# Altium PCB 40 pin hbridge.PcbDoc
Units mm, origin at the board's own origin, x right, y up, seen from the top; angles counter-clockwise.
Board outline 214.76 x 118.74 mm, 2 copper layers (Top Layer, Bottom Layer); 18 components, 24 nets, 141 pads, 21 vias.
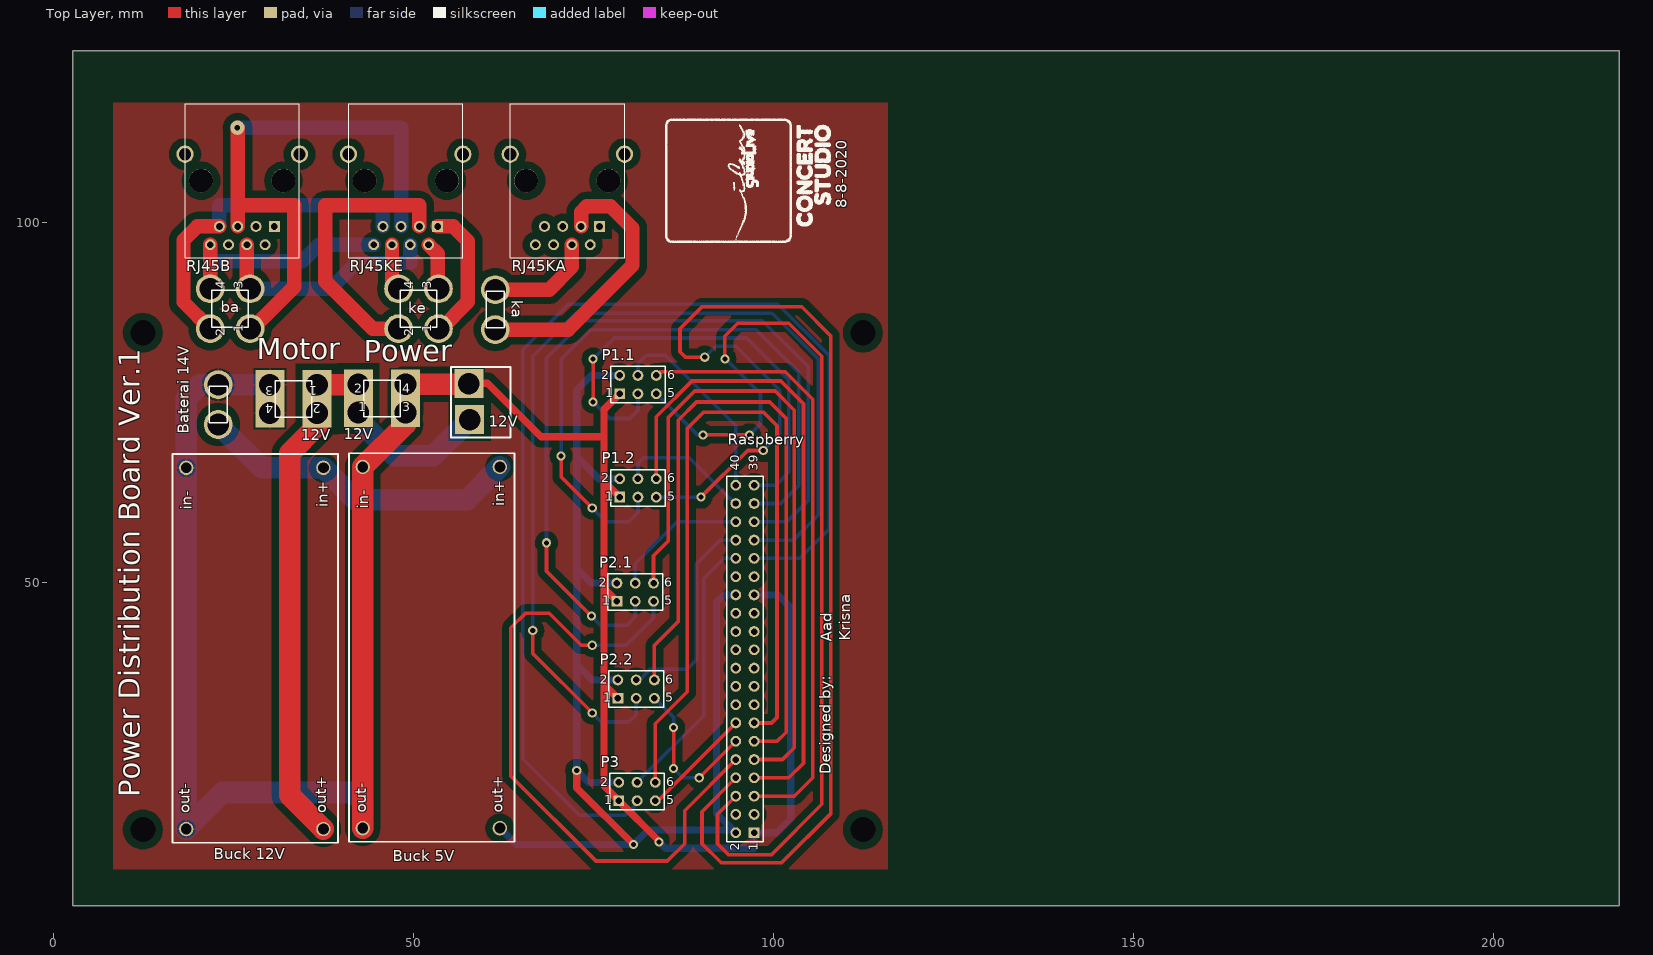
[diagram p0: Top Layer view]
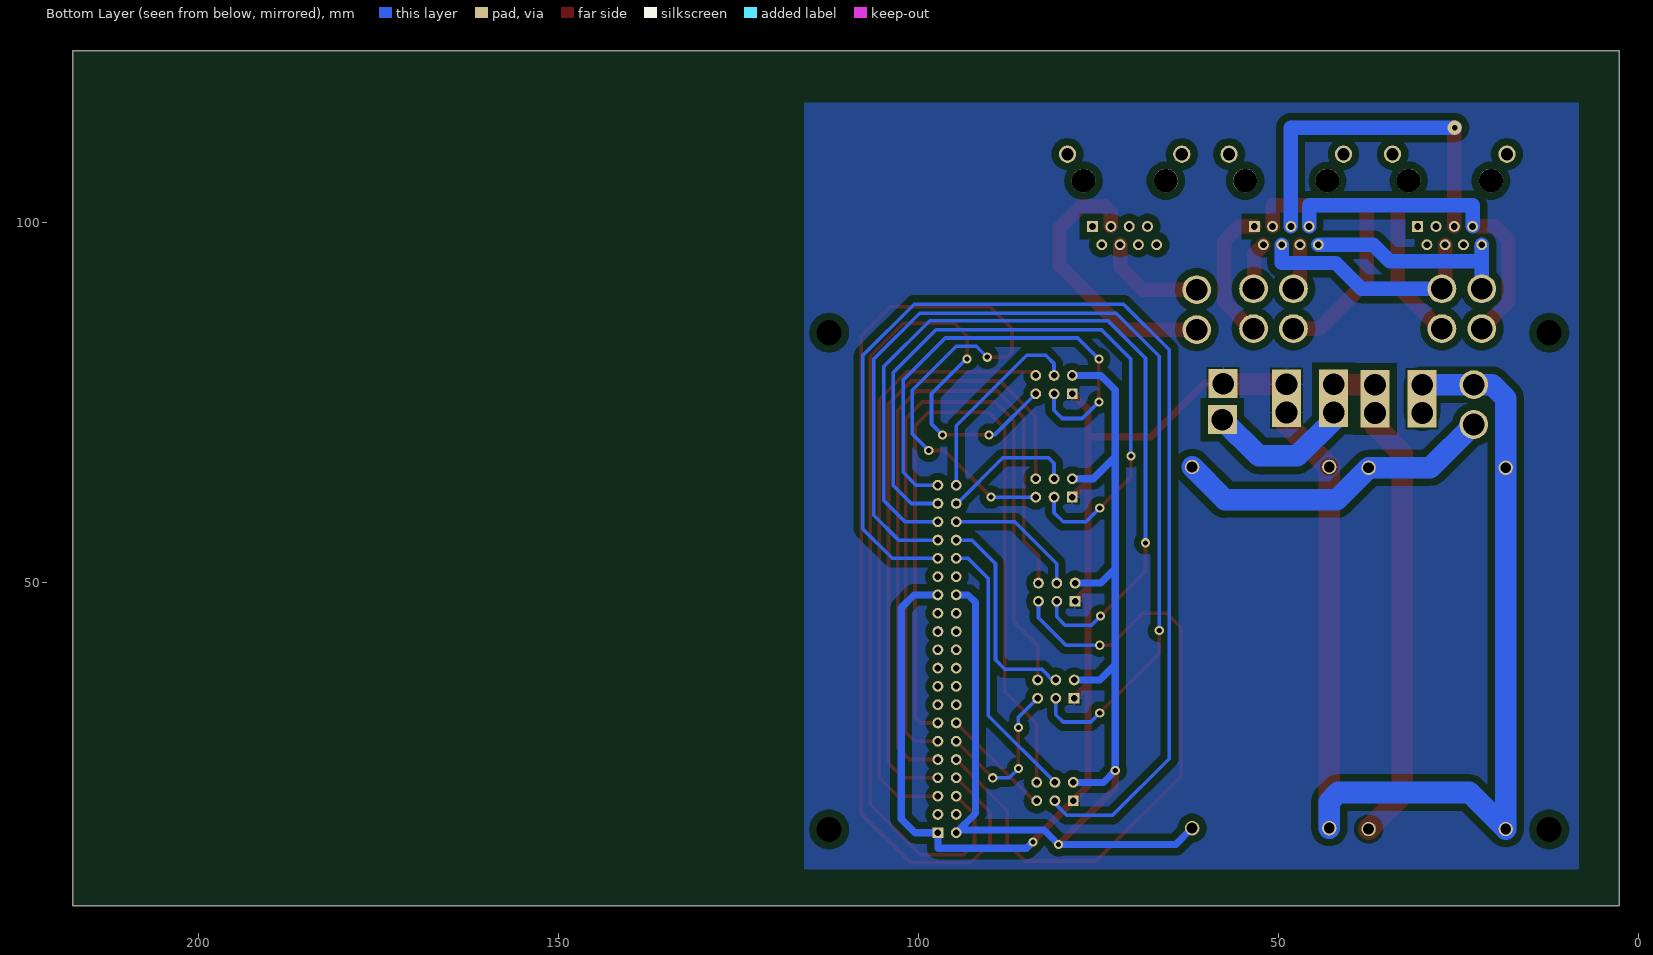
[diagram p1: Bottom Layer view, seen from below]

## Layer stack, top to bottom
Top Solder: solder mask 0.0102, Solder Resist, Dk 3.5
Top Layer: signal copper 0.0356
Dielectric 1: dielectric 0.32, FR-4, Dk 4.8
Bottom Layer: signal copper 0.0356
Bottom Solder: solder mask 0.0102, Solder Resist, Dk 3.5

## Board outline
2.667,5.08 58.928,5.08 110.49,5.08 165.735,5.08 217.424,5.08 217.424,123.825 165.735,123.825 110.49,123.825 58.928,123.825 2.667,123.825

## Design rules (kind name [scope] priority, off if disabled: settings)
Clearance [All] p1: gap=0.5
PolygonConnect [All] p1: connectstyle=Relief reliefconductorwidth=0.254 reliefentries=4 polygonreliefangle="90 Angle" airgapwidth=0.254
RoutingVias [All] p1: holewidth=0.711 width=1.27 viastyle="Through Hole" minholewidth=0.711 minwidth=1.27 maxholewidth=0.711 maxwidth=1.27
SolderMaskExpansion [All] p1: expansion=0.102
UnpouredPolygon [All] p1: allowunpoured=FALSE
Width [All] p1: maxlimit=3 minlimit=0.5 preferedwidth=1
29 further rules are at their usual default settings.

## Classes and differential pairs
component class "40 pin hbridge": "Baterai 14V" P1.1 P1.2 P2.1 P2.2 P3 Raspberry

## Components (designator, comment, footprint, x,y, rotation, side; value= is the part's Value field where it differs from the comment)
12V "Header 2X2" HDR2X2#1 44.323,74.295 r0 top
12V "Header 2X2" HDR2X2#1 34.576,76.77 r180 top
12V "Header" PCBComponent_1#1 55.372,70.612 r90 top
ba "Header 2X2" HDR2X2#2 25.781,86.741 r90 top
"Baterai 14V" "Header 2" HDR1X2 22.86,73.43 r90 top
"Buck 5V" "Buck 5V" PCBComponent_1#2 41.021,13.97 r90 top (schematic designator *)
"Buck 12V" "Buck 12V" PCBComponent_1#2 16.51,13.843 r90 top (schematic designator *)
ka "Header 2" HDR1X2 61.341,86.614 r90 top
ke "Header 2X2" HDR2X2#2 51.943,86.741 r90 top
P1.1 "Header 3X2" HDR2X3 78.613,76.2 r0 top
P1.2 "Header 3X2" HDR2X3 78.613,61.849 r0 top
P2.1 "Header 3X2" HDR2X3 78.232,47.371 r0 top
P2.2 "Header 3X2" HDR2X3 78.359,33.909 r0 top
P3 "Header 3X2" HDR2X3 78.486,19.685 r0 top
Raspberry "Header 20X2" HDR2X20 97.282,15.24 r90 top
RJ45B "" PCBComponent_1#3 30.64,99.441 r180 top
RJ45KA "" PCBComponent_1#3 75.791,99.441 r180 top
RJ45KE "" PCBComponent_1#3 53.34,99.441 r180 top

## Footprints (in the part's own frame and the unit in brackets; to place one, negate y for a bottom-side part, rotate by r counter-clockwise, add the part's x,y. Pads: shape width x height; smd on the part's side, far side on the other; paste and mask are expansions set on the pad)
HDR1X2 [mm] "Connector; Header; 2 Position"
  round 4 hole 3: 1(-1.5,0) 2(4.04,0)
  silkscreen extent -1.27,-1.27 3.81,1.27
HDR2X2#1 [mm] "Connector; Header; 2x2 Position"
  rect 4x4 hole 3: 1(-2,-0.7) 2(-2,3.24) 3(4.54,-0.7) 4(4.54,3.24)
  silkscreen extent -1.27,-1.27 3.81,3.81
HDR2X2#2 [mm] "Connector; Header; 2x2 Position"
  round 4 hole 3: 1(-1.5,-1.5) 2(-1.5,4.04) 3(4.04,-1.5) 4(4.04,4.04)
  silkscreen extent -1.27,-1.27 3.81,3.81
HDR2X3 [mm] "Connector; Header; 3x2 Position"
  rect 1.5x1.5 hole 0.9: 1(0,0)
  round 1.5 hole 0.9: 2(0,2.54) 3(2.54,0) 4(2.54,2.54) 5(5.08,0) 6(5.08,2.54)
  silkscreen extent -1.27,-1.27 6.35,3.81
HDR2X20 [mm] "Connector; Header; 20x2 Position"
  rect 1.5x1.5 hole 0.9: 1(0,0)
  round 1.5 hole 0.9: 2(0,2.54) 3(2.54,0) 4(2.54,2.54) 5(5.08,0) 6(5.08,2.54) 7(7.62,0) 8(7.62,2.54) 9(10.16,0) 10(10.16,2.54) 11(12.7,0) 12(12.7,2.54) 13(15.24,0) 14(15.24,2.54) 15(17.78,0) 16(17.78,2.54) 17(20.32,0) 18(20.32,2.54) 19(22.86,0) 20(22.86,2.54) 21(25.4,0) 22(25.4,2.54) 23(27.94,0) 24(27.94,2.54) 25(30.48,0) 26(30.48,2.54) 27(33.02,0) 28(33.02,2.54) 29(35.56,0) 30(35.56,2.54) 31(38.1,0) 32(38.1,2.54) 33(40.64,0) 34(40.64,2.54) 35(43.18,0) 36(43.18,2.54) 37(45.72,0) 38(45.72,2.54) 39(48.26,0) 40(48.26,2.54)
  silkscreen extent -1.27,-1.27 49.53,3.81
PCBComponent_1#1 [mm]
  rect 4x4 hole 3: 1(1.999,-2.4) 2(6.999,-2.295)
  silkscreen extent -0.5,-8.1 9.3,0.2
PCBComponent_1#2 [mm]
  round 2 hole 1.5: 1(1.905,-1.905) 2(1.905,-20.955) 3(52.07,-1.905) 4(52.07,-20.955)
  silkscreen extent 0,-22.99 53.97,0
PCBComponent_1#3 [mm]
  round 2.4 hole 1.7: 0(-3.495,-10.03) 0(12.385,-10.03)
  rect 1.524x1.524 hole 0.95: 1(0,0)
  round 1.524 hole 0.95: 2(1.27,2.54) 3(2.54,0) 4(3.81,2.54) 5(5.08,0) 6(6.35,2.54) 7(7.62,0) 8(8.89,2.54)
  round 3.3 hole 3.3 unplated: ""(-1.27,-6.35) ""(10.16,-6.35)
  silkscreen extent -3.49,-17.05 12.38,4.35

## Part data
12V 12V ba ke: "Header, 2-Pin, Dual row"
12V "Buck 5V" "Buck 12V": library part Component_1
"Baterai 14V" ka: "Header, 2-Pin"
P1.1 P1.2 P2.1 P2.2 P3: "Header, 3-Pin, Dual row"
Raspberry: "Header, 20-Pin, Dual row"
RJ45B RJ45KA RJ45KE: library part R-RJ45R08P-B000

## Free pads (board coordinates)
  round 1.524 hole 3.5 mask+2: 1(12.389,15.68) 1(12.389,84.68) 1(112.389,15.68) 1(112.389,84.68)
  round 2 hole 0.762: 3(25.527,113.157)

## Via types
v1: diameter 1.27, hole 0.711, Top Layer to Bottom Layer, 21 vias

## Nets (pads, with @x,y where several pads share a name; then routed paths per layer and width w, separated by ;. In a path a pad name is that pad's centre, name@x,y a point inside that pad or via, vN(x,y) a via of type N, cw(c..) or ccw(c..) an arc to the next point about the centre after c; other vN are vias at no path point)
5V: "Buck 5V.2" P1.1.2 P1.2.2 P2.1.2 P2.2.2 P3.2 Raspberry.2 Raspberry.28 | length 170.9
  Top Layer w1: v1(72.644,23.876) 72.644,21.463 v1(80.518,13.589)
  Bottom Layer w1: 61.976,15.875 64.262,13.589 v1(80.518,13.589) 82.534,15.605 94.377,15.605 Raspberry.2 92.075,17.907 92.075,47.244 93.091,48.26 Raspberry.28 ; P2.1.2 74.676,49.911 72.644,51.943 ; P2.2.2 74.803,36.449 72.644,38.608 ; P3.2 74.295,22.225 v1(72.644,23.876) 72.644,38.608 ; P1.2.2 75.692,64.389 72.644,67.437 ; P1.1.2 74.676,78.74 72.644,76.708 72.644,67.437 ; 72.644,38.608 72.644,51.943 ; 72.644,51.943 72.644,67.437
12V: 12V.1 12V.2@36.576,73.53 12V.2@42.323,77.535 "Buck 12V.2" | length 95.4
  Top Layer w3: 37.465,15.748 32.766,20.447 32.766,67.945 36.576,71.755 36.576,73.53 36.576,77.47 42.258,77.47 42.258,73.66 12V.1@42.323,73.595
  Bottom Layer w3: 12V.1@42.323,73.595 42.323,72.612 47.371,67.564 52.725,67.564 12V.1@57.772,72.611
14V: "Baterai 14V.1" "Buck 5V.4" "Buck 12V.4" | length 45.3
  Bottom Layer w3: 22.86,71.93 28.877,65.913 37.465,65.913 41.91,61.468 57.404,61.468 61.976,66.04
D2: P1.1.6 Raspberry.5 | length 85.3
  Top Layer w0.5: P1.1.6 84.201,79.248 101.6,79.248 105.41,75.438 105.41,22.86 102.87,20.32 Raspberry.5
D3: P1.1.5 Raspberry.6 | length 136.2
  Top Layer w0.5: v1(90.17,70.485) v1(96.647,70.485) v1@96.901,70.485 ; v1(93.218,81.026) 93.218,84.201 94.996,85.979 102.108,85.979 106.68,81.407 106.68,19.177 99.695,12.192 93.726,12.192 92.202,13.716 92.202,17.78 Raspberry.6
  Bottom Layer w0.5: P1.1.5 89.408,70.485 v1(90.17,70.485) v1@90.424,70.485 ; v1@93.281,81.09 98.171,76.2 98.171,72.009 v1(96.647,70.485)
D4: P1.2.6 Raspberry.7 | length 90.1
  Top Layer w0.5: P1.2.6 83.693,73.025 88.646,77.978 100.965,77.978 104.14,74.803 104.14,24.892 102.108,22.86 Raspberry.7
D5: P1.2.5 Raspberry.8 | length 171.5
  Top Layer w0.5: v1(89.916,61.849) 96.393,68.326 v1(98.552,68.326) v1@98.806,68.326 ; v1(90.424,81.28) 87.757,81.28 86.995,82.042 86.995,85.217 90.043,88.265 103.886,88.265 107.95,84.201 107.95,17.907 101.092,11.049 92.71,11.049 90.043,13.716 90.043,18.161 Raspberry.8
  Bottom Layer w0.5: P1.2.5 v1(89.916,61.849) v1@90.28,61.849 ; v1@90.17,81.026 v1(90.424,81.28) 91.948,82.804 94.742,82.804 100.838,76.708 100.838,70.612 v1(98.552,68.326)
D6: P2.1.6 Raspberry.9 | length 97.1
  Top Layer w0.5: P2.1.6 83.312,53.721 85.344,55.753 85.344,72.898 89.027,76.581 100.203,76.581 102.87,73.914 102.87,27.051 101.219,25.4 Raspberry.9
D9: P2.1.5 Raspberry.10 | length 92
  Top Layer w0.5: v1(74.803,41.275) 73.279,41.275 68.834,45.72 65.532,45.72 63.5,43.688 63.5,23.114 75.311,11.303 85.217,11.303 87.63,13.716 87.63,18.288 Raspberry.10
  Bottom Layer w0.5: v1@74.422,41.275 v1(74.803,41.275) 79.502,41.275 83.312,45.085 P2.1.5
D10: P2.2.6 Raspberry.11 | length 103
  Top Layer w0.5: P2.2.6 83.439,41.275 86.741,44.577 86.741,72.517 89.281,75.057 99.441,75.057 101.727,72.771 101.727,29.21 100.457,27.94 Raspberry.11
D11: P2.2.5 Raspberry.12 | length 22.9
  Top Layer w0.5: v1(86.106,24.13) v1(86.106,29.845) v1@86.106,30.099 ; v1@89.535,22.733 v1(89.662,22.86) Raspberry.12
  Bottom Layer w0.5: P2.2.5 86.106,31.242 v1(86.106,29.845) ; v1@85.852,24.384 v1(86.106,24.13) 87.376,22.86 v1(89.662,22.86)
D12: P3.6 Raspberry.13 | length 109.2
  Top Layer w0.5: P3.6 83.566,30.353 88.011,34.798 88.011,71.374 90.297,73.66 98.552,73.66 100.457,71.755 100.457,31.242 99.695,30.48 Raspberry.13
D13: P3.5 Raspberry.14 | length 15.6
  Top Layer w0.5: P3.5 83.947,19.685 Raspberry.14
D32: P1.1.4 Raspberry.40 | length 28
  Bottom Layer w0.5: P1.1.4 81.153,80.391 82.296,81.534 84.963,81.534 94.742,71.755 Raspberry.40
D33: P1.1.3 Raspberry.39 | length 65.7
  Top Layer w0.5: v1(74.93,75.057) v1(74.93,81.026) v1@74.93,81.28
  Bottom Layer w0.5: v1@74.676,75.311 v1(74.93,75.057) 77.216,72.771 80.01,72.771 81.153,73.914 P1.1.3 ; v1(74.93,81.026) 77.851,83.947 96.266,83.947 102.108,78.105 102.108,65.278 100.33,63.5 Raspberry.39
D34: P1.2.4 Raspberry.38 | length 18.7
  Bottom Layer w0.5: P1.2.4 81.153,66.548 81.915,67.31 88.265,67.31 94.615,60.96 Raspberry.38
D35: P1.2.3 Raspberry.37 | length 92.9
  Top Layer w0.5: v1@70.485,67.945 v1(70.485,67.564) 70.485,64.643 v1(74.803,60.325)
  Bottom Layer w0.5: v1(70.485,67.564) 70.485,81.026 74.549,85.09 97.536,85.09 103.505,79.121 103.505,63.5 100.965,60.96 Raspberry.37 ; v1@74.676,60.452 v1(74.803,60.325) 76.708,58.42 79.883,58.42 81.153,59.69 P1.2.3
D36: P2.1.4 Raspberry.36 | length 19.1
  Bottom Layer w0.5: P2.1.4 80.772,52.578 86.614,58.42 Raspberry.36
D37: P2.1.3 Raspberry.35 | length 116.9
  Top Layer w0.5: v1@68.453,55.88 v1(68.453,55.499) 68.453,51.562 v1(74.676,45.339)
  Bottom Layer w0.5: v1(68.453,55.499) 68.453,81.153 73.66,86.36 98.425,86.36 104.775,80.01 104.775,61.341 101.854,58.42 Raspberry.35 ; v1@74.422,45.593 v1(74.676,45.339) 75.946,44.069 79.629,44.069 80.772,45.212 P2.1.3
D38: P2.2.4 Raspberry.34 | length 29.8
  Bottom Layer w0.5: P2.2.4 81.407,36.449 81.939,36.981 81.939,37.07 82.818,37.949 87.987,37.949 89.281,39.243 89.281,52.578 92.583,55.88 Raspberry.34
D39: P2.2.3 Raspberry.33 | length 139.9
  Top Layer w0.5: v1@66.548,43.815 v1(66.548,43.307) 66.548,40.132 v1(74.803,31.877)
  Bottom Layer w0.5: v1(66.548,43.307) 66.548,81.407 72.517,87.376 99.822,87.376 106.172,81.026 106.172,59.309 102.743,55.88 Raspberry.33 ; v1@74.549,32.131 v1(74.803,31.877) 76.073,30.607 79.883,30.607 80.899,31.623 P2.2.3
D40: P3.4 Raspberry.32 | length 37.8
  Bottom Layer w0.5: P3.4 90.297,31.496 90.297,50.546 93.091,53.34 Raspberry.32
D41: P3.3 Raspberry.31 | length 161.3
  Bottom Layer w0.5: P3.3 81.026,19.304 79.375,17.653 73.025,17.653 65.151,25.527 65.151,82.296 71.501,88.646 100.584,88.646 107.696,81.534 107.696,57.404 103.632,53.34 Raspberry.31
GND: 12V.2@57.667,77.611 12V.3 12V.4 "Baterai 14V.2" "Buck 5V.1" "Buck 5V.3" "Buck 12V.1" "Buck 12V.3" P1.1.1 P1.2.1 P2.1.1 P2.2.1 P3.1 Raspberry.1 Raspberry.27 | length 331.1
  Top Layer w1: 12V.2@57.667,77.659 60.263,77.659 67.691,70.231 76.454,70.231 ; P2.1.1 76.454,49.149 ; P2.2.1 76.454,35.814 ; P1.2.1 76.454,64.008 ; P1.1.1 76.454,74.041 76.454,70.231 ; v1(84.074,13.97) 84.074,14.097 P3.1 76.454,21.717 76.454,35.814 ; 76.454,35.814 76.454,49.149 ; 76.454,49.149 76.454,64.008 ; 76.454,64.008 76.454,70.231
  Top Layer w3: 42.926,15.875 42.926,66.04 12V.3@48.863,71.977 ; 12V.3@48.863,73.595 48.863,77.535 12V.2@57.591,77.535
  Bottom Layer w1: v1(84.074,13.97) 84.963,13.081 ; 85.217,13.081 97.282,13.081 Raspberry.1 100.457,15.24 102.362,17.145 102.362,46.482 100.584,48.26 Raspberry.27
  Bottom Layer w3: 12V.4@30.036,73.53 30.036,77.47 22.86,77.47 20.32,77.47 18.415,75.565 18.415,65.913 18.415,15.748 23.495,20.828 41.656,20.828 42.926,19.558 42.926,15.875
pads on no net: ba.1 ba.2 ba.3 ba.4 ka.1 ka.2 ke.1 ke.2 ke.3 ke.4 Raspberry.3 Raspberry.4 Raspberry.15 Raspberry.16 Raspberry.17 Raspberry.18 Raspberry.19 Raspberry.20 Raspberry.21 Raspberry.22 Raspberry.23 Raspberry.24 Raspberry.25 Raspberry.26 Raspberry.29 Raspberry.30 RJ45B. RJ45B.0 RJ45B.1 RJ45B.2 RJ45B.3 RJ45B.4 RJ45B.5 RJ45B.6 RJ45B.7 RJ45B.8 RJ45KA. RJ45KA.0 RJ45KA.1 RJ45KA.2 RJ45KA.3 RJ45KA.4 RJ45KA.5 RJ45KA.6 RJ45KA.7 RJ45KA.8 RJ45KE. RJ45KE.0 RJ45KE.1 RJ45KE.2 RJ45KE.3 RJ45KE.4 RJ45KE.5 RJ45KE.6 RJ45KE.7 RJ45KE.8
copper on no net: | length 320.1
  Top Layer w2: 21.741,85.241 18.034,88.948 18.034,97.536 19.939,99.441 23.02,99.441 ; 21.741,85.749 21.741,86.013 ; 21.75,96.901 21.75,91.661 22.122,91.289 ; 25.56,99.441 25.56,102.362 ; 25.56,113.157 25.56,102.362 ; 26.83,96.901 26.83,91.232 27.281,90.781 ; 27.281,85.241 27.584,85.241 33.402,91.059 33.402,102.362 25.56,102.362 ; 46.99,96.901 46.99,91.694 47.903,90.781 ; 47.903,85.241 44.299,85.241 37.719,91.821 37.719,102.362 50.8,102.362 50.8,99.441 ; 52.07,96.901 53.34,95.631 53.34,90.781 ; 53.34,99.441 55.499,99.441 57.531,97.409 57.531,88.958 53.814,85.241 53.443,85.241 ; 61.341,85.114 71.477,85.114 80.391,94.028 80.391,99.187 77.343,102.235 74.041,102.235 73.251,101.445 73.251,99.441 ; 61.341,90.654 68.81,90.654 71.981,93.825 71.981,96.901
  Bottom Layer w2: 21.717,94.615 21.75,94.615 ; 21.75,90.79 21.75,94.615 ; 21.75,96.901 21.75,94.615 ; 23.027,99.448 23.027,102.362 45.72,102.362 45.72,99.441 ; 25.527,113.157 48.26,113.157 48.26,99.441 ; 27.281,90.781 38.457,90.781 42.037,94.361 49.53,94.361 49.53,96.901 ; 27.281,91.289 27.511,91.059 ; 44.45,96.901 36.83,96.901 34.544,94.615 21.75,94.615

## Polygon pours and split planes (outlines as drawn)
GND on Top Layer "base" (solid, pour order 4): 8.255,10.16 115.824,10.16 115.824,116.586 8.255,116.586 8.255,10.16
GND on Bottom Layer "base" (solid, pour order 6): 8.255,116.586 8.255,10.16 115.824,10.16 115.824,116.586 8.255,116.586

## Silkscreen, mask and mechanical layers (free items; w line width, h text height)
Top Overlay:
  drawing of 1443 lines, arcs and shapes, not listed
  text "8-8-2020" at 110.16,101.981 h1.52 r90
  text "Motor" at 28.194,80.01 h5
  text "Power" at 43.053,79.756 h5
  text "Krisna" at 110.617,41.91 h1.52 r90
  text "Aad" at 108.077,41.783 h1.52 r90
  text "Designed by:" at 107.95,23.368 h1.52 r90
  text "Power Distribution Board Ver.1" at 12.954,20.193 h5 r90
Mechanical 1:
  lines w0.5: 8.255,10.16 8.255,116.586 115.824,116.586 115.824,10.16 8.255,10.16

## Dimensions
63.406,116.491 to 79.375,113.792 on Mechanical 1
56.835,116.491 to 63.373,116.713 on Mechanical 1
34.163,116.84 to 40.894,116.84 on Mechanical 1
8.255,116.84 to 18.161,116.84 on Mechanical 1
112.389,84.68 to 111.887,116.586 on Mechanical 1
12.389,84.68 to 12.319,116.586 on Mechanical 1
12.319,116.586 to 8.128,10.16 on Mechanical 1
112.389,15.68 to 115.824,15.367 on Mechanical 1
112.389,15.68 to 112.522,10.287 on Mechanical 1
12.389,15.68 to 12.192,10.287 on Mechanical 1
12.389,15.68 to 8.255,15.748 on Mechanical 1
12.389,84.68 to 8.255,84.836 on Mechanical 1
112.389,84.68 to 115.824,84.455 on Mechanical 1
8.128,10.16 to 115.824,10.16 on Mechanical 1

## Text inside footprints (layer, text, board x,y; h text height)
12V: Top Overlay "1" at 42.291,73.787 h1.27; Top Overlay "2" at 41.783,76.327 h1.27; Top Overlay "4" at 48.387,76.327 h1.27; Top Overlay "3" at 48.387,73.787 h1.27
12V: Top Overlay "1" at 36.608,77.278 h1.27 r180; Top Overlay "2" at 37.116,74.738 h1.27 r180; Top Overlay "4" at 30.512,74.738 h1.27 r180; Top Overlay "3" at 30.512,77.278 h1.27 r180
ba: Top Overlay "1" at 26.289,84.709 h1.27 r90; Top Overlay "2" at 23.749,84.201 h1.27 r90; Top Overlay "4" at 23.749,90.805 h1.27 r90; Top Overlay "3" at 26.289,90.805 h1.27 r90
"Buck 5V": Top Overlay "out-" at 43.434,18.034 h1.52 r90; Top Overlay "out+" at 62.357,18.034 h1.52 r90; Top Overlay "in-" at 43.688,60.198 h1.52 r90; Top Overlay "in+" at 62.611,60.579 h1.52 r90
"Buck 12V": Top Overlay "out-" at 18.923,17.907 h1.52 r90; Top Overlay "out+" at 37.846,17.907 h1.52 r90; Top Overlay "in-" at 19.177,60.071 h1.52 r90; Top Overlay "in+" at 38.1,60.452 h1.52 r90
ke: Top Overlay "1" at 52.451,84.709 h1.27 r90; Top Overlay "2" at 49.911,84.201 h1.27 r90; Top Overlay "4" at 49.911,90.805 h1.27 r90; Top Overlay "3" at 52.451,90.805 h1.27 r90
P1.1: Top Overlay "6" at 85.217,78.232 h1.27; Top Overlay "5" at 85.217,75.692 h1.27; Top Overlay "2" at 76.073,78.232 h1.27; Top Overlay "1" at 76.581,75.692 h1.27
P1.2: Top Overlay "6" at 85.217,63.881 h1.27; Top Overlay "5" at 85.217,61.341 h1.27; Top Overlay "2" at 76.073,63.881 h1.27; Top Overlay "1" at 76.581,61.341 h1.27
P2.1: Top Overlay "6" at 84.836,49.403 h1.27; Top Overlay "5" at 84.836,46.863 h1.27; Top Overlay "2" at 75.692,49.403 h1.27; Top Overlay "1" at 76.2,46.863 h1.27
P2.2: Top Overlay "6" at 84.963,35.941 h1.27; Top Overlay "5" at 84.963,33.401 h1.27; Top Overlay "2" at 75.819,35.941 h1.27; Top Overlay "1" at 76.327,33.401 h1.27
P3: Top Overlay "6" at 85.09,21.717 h1.27; Top Overlay "5" at 85.09,19.177 h1.27; Top Overlay "2" at 75.946,21.717 h1.27; Top Overlay "1" at 76.454,19.177 h1.27
Raspberry: Top Overlay "1" at 97.79,12.7 h1.27 r90; Top Overlay "2" at 95.25,12.7 h1.27 r90; Top Overlay "40" at 95.25,65.532 h1.27 r90; Top Overlay "39" at 97.79,65.532 h1.27 r90